# Altium PCB AVR Board 4.0 R1.PcbDoc (part 2 of 2)
Units mil, origin at the board's own origin, x right, y up, seen from the top; angles counter-clockwise.
Board outline 5050 x 3125 mil, 2 copper layers (Top Layer, Bottom Layer); 127 components, 141 nets, 588 pads, 126 vias.
Unrouted connection lines stored in the file: 1.
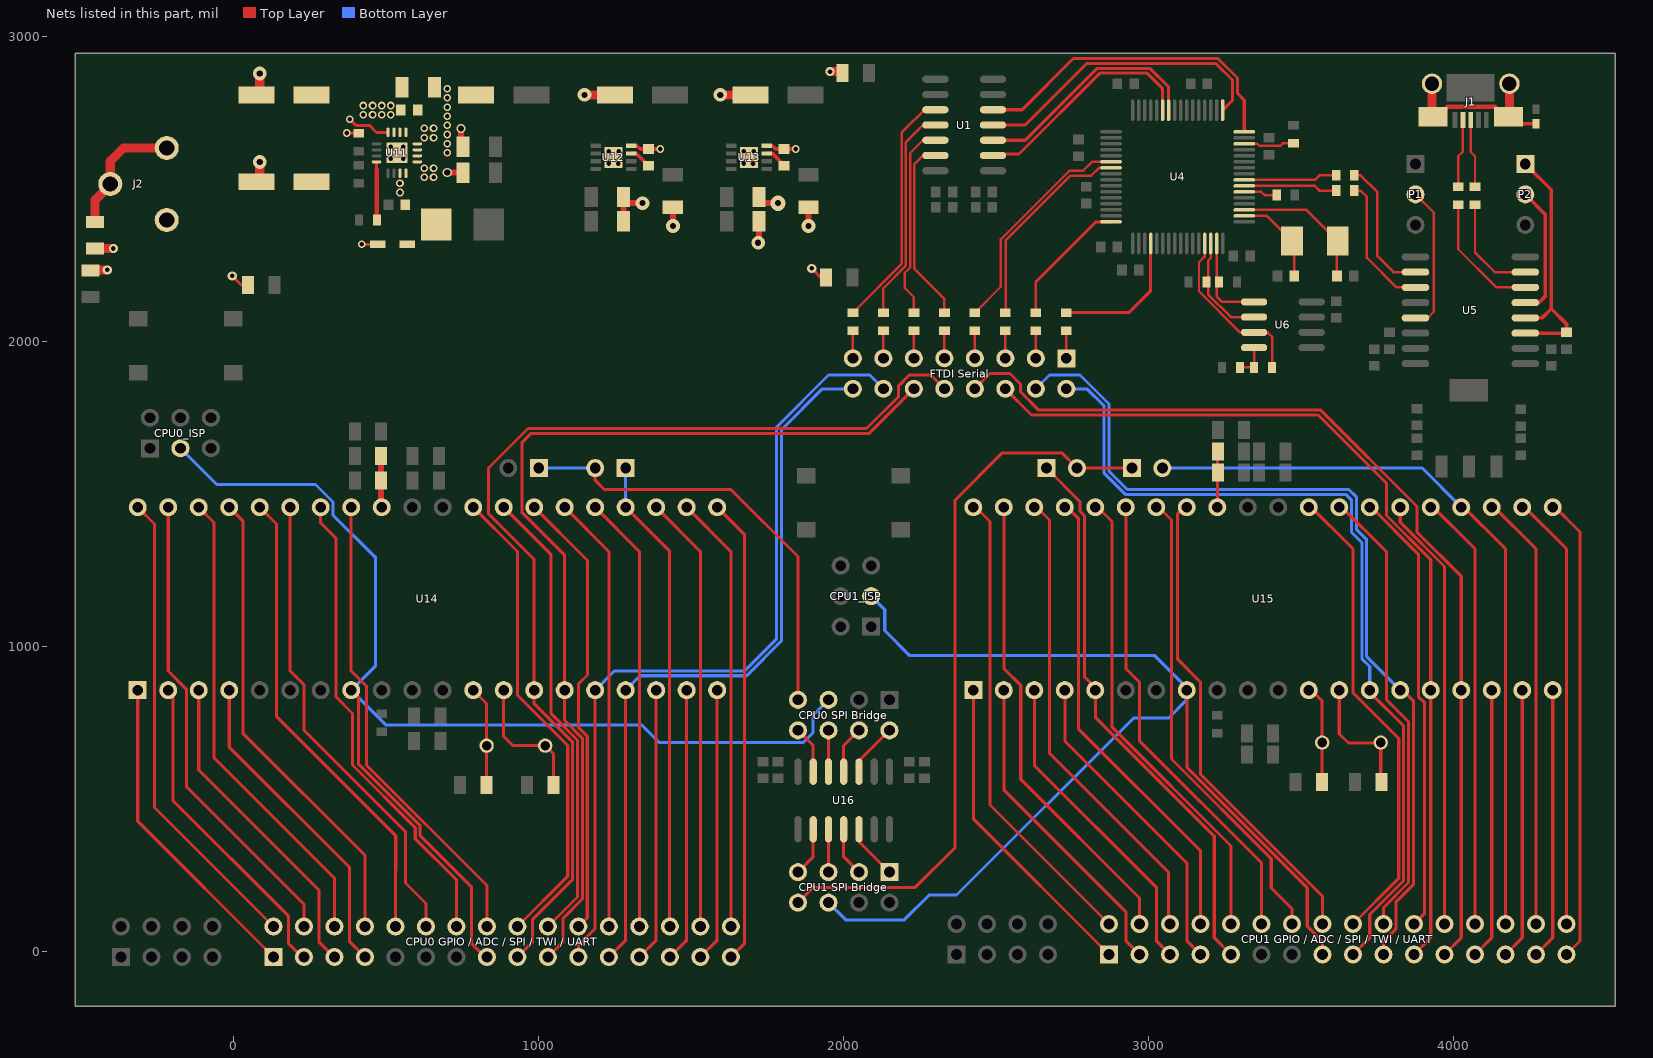
[diagram p2: the nets of this part, all layers, seen from the top]

## Via types
v1: diameter 25, hole 15, Top Layer to Bottom Layer, 82 vias
v2: diameter 30, hole 15, Top Layer to Bottom Layer, 25 vias
v3: diameter 45, hole 20, Top Layer to Bottom Layer, 14 vias
v4: diameter 30, hole 20, Top Layer to Bottom Layer, 4 vias
v5: diameter 50, hole 20, Top Layer to Bottom Layer, 1 vias

## Nets (pads, with @x,y where several pads share a name; then routed paths per layer and width w, separated by ;. In a path a pad name is that pad's centre, name@x,y a point inside that pad or via, vN(x,y) a via of type N, cw(c..) or ccw(c..) an arc to the next point about the centre after c; other vN are vias at no path point) (continued)
NetC24_2: C24.2 P2.1 U5.3 U5.4 | length 841.6
  Top Layer w12: P2.1@4235,2582.5 4320,2497.5 4320,2107.5 ; U5.3@4235.12,2027.5 4367.44,2027.5 C24.2@4370,2030.06 4370,2057.5 4320,2107.5 ; U5.4@4235.12,2077.5 4290,2077.5 4320,2107.5
NetC26_2: C26.2 U4.2 X1.1 | length 308.6
  Top Layer w8: U4.2@3313.5,2412.05 3387.95,2412.05 X1.1@3470,2330 3477.56,2322.44 C26.2@3477.56,2215
NetC27_2: C27.2 U4.3 X1.2 | length 464.1
  Top Layer w8: U4.3@3313.5,2431.73 3517.87,2431.73 X1.2@3619.61,2330 3617.44,2327.83 C27.2@3617.44,2215
NetC48_2: C48.2 U12.3 | length 73.6
  Top Layer w12: U12.3@1303.07,2616.57 1319.65,2616.57 C48.2@1360,2576.22
NetC53_2: C53.2 U13.3 | length 74.9
  Top Layer w12: U13.3@1747.52,2616.57 1766.2,2616.57 1804.45,2578.32 C53.2@1804.45,2576.22
NetC63_2: C63.2 FB7.2 U14.32 | length 169
  Top Layer w20: FB7.2@483.31,1625 C63.2@483.31,1545 483.31,1458.41 U14.32@485,1456.72
NetC65_2: C65.2 FB8.2 U15.32 | length 175.7
  Top Layer w10: U15.32@3225,1465 3225,1638.31 FB8.2@3226.69,1640
NetC66_2: C66.2 U14.12 X2.1 | length 329.3
  Top Layer w10: U14.12@785,856.72 828.94,812.78 X2.1@828.94,675 C66.2@828.94,545.63
NetC67_2: C67.2 U14.13 X2.2 | length 441.5
  Top Layer w10: U14.13@885,856.72 885,705 915,675 X2.2@1021.06,675 1048.31,647.76 C67.2@1048.31,545
NetC68_2: C68.2 U15.12 X3.1 | length 328.5
  Top Layer w10: U15.12@3525,865 3568.94,821.06 X3.1@3568.94,685 3568.94,555.63 C68.2@3568.31,555
NetC69_2: C69.2 U15.13 X3.2 | length 431.1
  Top Layer w10: U15.13@3625,865 3625,713.28 3655,683.28 X3.2@3761.06,683.28 ; X3.2@3761.06,685 X3.2@3761.06,683.28 ; C69.2@3763.31,555 3761.06,557.24 X3.2@3761.06,683.28
"NetCPU0 GPIO / ADC / SPI / TWI / UART_1": "CPU0 GPIO / ADC / SPI / TWI / UART.1" U14.1 | length 1059.3
  Top Layer w10: U14.1@-315,856.72 -315,426.72 130,-18.28
"NetCPU0 GPIO / ADC / SPI / TWI / UART_2": "CPU0 GPIO / ADC / SPI / TWI / UART.2" U14.40 | length 1559.3
  Top Layer w10: U14.40@-315,1456.72 -260,1401.72 -260,471.72 130,81.72
"NetCPU0 GPIO / ADC / SPI / TWI / UART_3": "CPU0 GPIO / ADC / SPI / TWI / UART.3" U14.2 | length 1065.7
  Top Layer w10: U14.2@-215,856.72 -200,841.72 -200,495 180,115 180,25 219.14,-14.14 234.14,-14.14
"NetCPU0 GPIO / ADC / SPI / TWI / UART_4": "CPU0 GPIO / ADC / SPI / TWI / UART.4" U14.39 | length 1559.3
  Top Layer w10: U14.39@-215,1456.72 -215,919.69 -155.53,860.21 -155.53,540.53 230,155 230,81.72
"NetCPU0 GPIO / ADC / SPI / TWI / UART_5": "CPU0 GPIO / ADC / SPI / TWI / UART.5" U14.3 | length 1068.1
  Top Layer w10: U14.3@-115,856.72 -115,595 280,200 280,30 335,-25
"NetCPU0 GPIO / ADC / SPI / TWI / UART_6": "CPU0 GPIO / ADC / SPI / TWI / UART.6" U14.38 | length 1559.3
  Top Layer w10: U14.38@-115,1456.72 -65,1406.72 -65,635 330,240 330,81.72
"NetCPU0 GPIO / ADC / SPI / TWI / UART_7": "CPU0 GPIO / ADC / SPI / TWI / UART.7" U14.4 | length 1059.3
  Top Layer w10: U14.4@-15,856.72 -15,670 380,275 380,31.72 430,-18.28
"NetCPU0 GPIO / ADC / SPI / TWI / UART_8": "CPU0 GPIO / ADC / SPI / TWI / UART.8" U14.37 | length 1566
  Top Layer w10: U14.37@-15,1456.72 29.53,1412.19 29.53,715.47 430,315 430,75
"NetCPU0 GPIO / ADC / SPI / TWI / UART_10": "CPU0 GPIO / ADC / SPI / TWI / UART.10" U14.36 | length 1560.2
  Top Layer w10: U14.36@85,1456.72 140,1401.72 140,846.72 140.47,846.24 140.47,769.78 531,379.25 531,267.86 530,266.86 530,81.72
"NetCPU0 GPIO / ADC / SPI / TWI / UART_12": "CPU0 GPIO / ADC / SPI / TWI / UART.12" U14.35 | length 1559.3
  Top Layer w10: U14.35@185,1456.72 185,919.69 229.53,875.16 229.53,725.98 563,392.51 563,224.37 630,157.37 630,81.72
"NetCPU0 GPIO / ADC / SPI / TWI / UART_14": "CPU0 GPIO / ADC / SPI / TWI / UART.14" U14.34 | length 1559.3
  Top Layer w10: U14.34@285,1456.72 285,1405 335,1355 335,835 389.53,780.47 389.53,611.24 595,405.76 595,370 730,235 730,81.72
"NetCPU0 GPIO / ADC / SPI / TWI / UART_16": "CPU0 GPIO / ADC / SPI / TWI / UART.16" U14.33 | length 1559.3
  Top Layer w10: U14.33@385,1456.72 385,919.69 435,869.69 435,611.02 830,216.02 830,81.72
"NetCPU0 GPIO / ADC / SPI / TWI / UART_17": "CPU0 GPIO / ADC / SPI / TWI / UART.17" "FTDI Serial.10" U14.14 | length 3453.1
  Top Layer w10: 930,-18.28 980,31.72 980,105.25 1111,236.25 1111,686.12 985,812.12 U14.14@985,856.72 985,1285 835,1435 835,1585 965,1715 2075,1715 2180,1820 2180,1855 2215,1890 2285,1890 2330,1845
"NetCPU0 GPIO / ADC / SPI / TWI / UART_18": "CPU0 GPIO / ADC / SPI / TWI / UART.18" U14.29 | length 1571.8
  Top Layer w10: U14.29@785,1456.72 930,1311.72 930,840 1095,675 1095,246.72 930,81.72
"NetCPU0 GPIO / ADC / SPI / TWI / UART_19": "CPU0 GPIO / ADC / SPI / TWI / UART.19" "FTDI Serial.12" U14.15 | length 3174.4
  Top Layer w10: 1030,-18.28 1080,31.72 1080,109.09 1143,172.09 1143,699.37 1085,757.37 U14.15@1085,856.72 1085,1299.4 944.47,1439.93 944.47,1668.47 975,1699 2084,1699 2230,1845
"NetCPU0 GPIO / ADC / SPI / TWI / UART_20": "CPU0 GPIO / ADC / SPI / TWI / UART.20" U14.28 | length 1515.4
  Top Layer w10: U14.28@885,1456.72 1040.47,1301.24 1040.47,779.27 1127,692.75 1127,178.72 1030,81.72
"NetCPU0 GPIO / ADC / SPI / TWI / UART_21": "CPU0 GPIO / ADC / SPI / TWI / UART.21" "FTDI Serial.14" U14.16 | length 2696.5
  Top Layer w10: 1130,-18.28 1130,20 1185,75 U14.16@1185,856.72
  Bottom Layer w10: U14.16@1185,856.72 1248.28,920 1675,920 1780,1025 1780,1720 1950,1890 2085,1890 2130,1845
"NetCPU0 GPIO / ADC / SPI / TWI / UART_22": "CPU0 GPIO / ADC / SPI / TWI / UART.22" U14.27 | length 1483.9
  Top Layer w10: U14.27@985,1456.72 1160,1281.72 1160,906.72 1130,876.72 1130,735 1159,706 1159,110.72 1130,81.72
"NetCPU0 GPIO / ADC / SPI / TWI / UART_23": "CPU0 GPIO / ADC / SPI / TWI / UART.23" "FTDI Serial.16" U14.17 | length 2457.9
  Top Layer w10: 1230,-18.28 1285,36.72 U14.17@1285,856.72
  Bottom Layer w10: U14.17@1285,856.72 1332.28,904 1681.63,904 1796,1018.37 1796,1711 1930,1845 2030,1845
"NetCPU0 GPIO / ADC / SPI / TWI / UART_24": "CPU0 GPIO / ADC / SPI / TWI / UART.24" U14.26 | length 1435.1
  Top Layer w10: U14.26@1085,1456.72 1230,1311.72 1230,81.72
"NetCPU0 GPIO / ADC / SPI / TWI / UART_25": "CPU0 GPIO / ADC / SPI / TWI / UART.25" U14.18 | length 897.8
  Top Layer w10: 1330,-18.28 1385,36.72 U14.18@1385,856.72
"NetCPU0 GPIO / ADC / SPI / TWI / UART_26": "CPU0 GPIO / ADC / SPI / TWI / UART.26" U14.25 | length 1435.1
  Top Layer w10: U14.25@1185,1456.72 1330,1311.72 1330,81.72
"NetCPU0 GPIO / ADC / SPI / TWI / UART_27": "CPU0 GPIO / ADC / SPI / TWI / UART.27" U14.19 | length 897.8
  Top Layer w10: 1430,-18.28 1485,36.72 U14.19@1485,856.72
"NetCPU0 GPIO / ADC / SPI / TWI / UART_29": "CPU0 GPIO / ADC / SPI / TWI / UART.29" U14.20 | length 897.8
  Top Layer w10: 1530,-18.28 1585,36.72 U14.20@1585,856.72
"NetCPU0 GPIO / ADC / SPI / TWI / UART_30": "CPU0 GPIO / ADC / SPI / TWI / UART.30" U14.23 | length 1435.1
  Top Layer w10: U14.23@1385,1456.72 1530,1311.72 1530,81.72
"NetCPU0 GPIO / ADC / SPI / TWI / UART_31": "CPU0 GPIO / ADC / SPI / TWI / UART.31" U14.21 | length 1530.9
  Top Layer w10: U14.21@1585,1456.72 1675,1366.72 1675,26.72 1630,-18.28
"NetCPU0 GPIO / ADC / SPI / TWI / UART_32": "CPU0 GPIO / ADC / SPI / TWI / UART.32" U14.22 | length 1435.1
  Top Layer w10: U14.22@1485,1456.72 1630,1311.72 1630,81.72
"NetCPU0 SPI Bridge Select_2": "CPU0 SPI Bridge.2" U16.10 | length 141.4
  Top Layer w10: U16.10@2050,625 2150,725
"NetCPU0 SPI Bridge Select_4": "CPU0 SPI Bridge.4" U16.11 | length 156.2
  Top Layer w10: U16.11@2000,589.49 2000,675 2050,725
"NetCPU0 SPI Bridge Select_6": "CPU0 SPI Bridge.6" U16.12 | length 135.5
  Top Layer w10: U16.12@1950,589.49 1950,725
"NetCPU0 SPI Bridge Select_8": "CPU0 SPI Bridge.8" U16.13 | length 156.2
  Top Layer w10: 1850,725 1900,675 U16.13@1900,589.49
NetCPU0-Master_1: "CPU0 GPIO / ADC / SPI / TWI / UART.28" CPU0-Master.1 U14.24 | length 1564.5
  Top Layer w10: U14.24@1285,1456.72 1428.03,1313.69 1428.03,81.72 1430,81.72
  Bottom Layer w10: U14.24@1285,1456.72 CPU0-Master.1@1285,1585
NetCPU0-Master_2: "CPU0 SPI Bridge.7" CPU0-Master.2 CPU0-Slave.1 | length 1463.6
  Top Layer w10: CPU0-Master.2@1185,1585 1185,1545 1215,1515 1630,1515 1850,1295 1850,825
  Bottom Layer w10: CPU0-Slave.1@1000,1585 CPU0-Master.2@1185,1585
"NetCPU1 GPIO / ADC / SPI / TWI / UART_1": "CPU1 GPIO / ADC / SPI / TWI / UART.1" U15.1 | length 1059.3
  Top Layer w10: U15.1@2425,865 2425,435 2870,-10
"NetCPU1 GPIO / ADC / SPI / TWI / UART_2": "CPU1 GPIO / ADC / SPI / TWI / UART.2" U15.40 | length 1559.3
  Top Layer w10: U15.40@2425,1465 2480,1410 2480,480 2870,90
"NetCPU1 GPIO / ADC / SPI / TWI / UART_3": "CPU1 GPIO / ADC / SPI / TWI / UART.3" U15.2 | length 1059.3
  Top Layer w10: U15.2@2525,865 2525,530 2925,130 2925,35 2970,-10
"NetCPU1 GPIO / ADC / SPI / TWI / UART_4": "CPU1 GPIO / ADC / SPI / TWI / UART.4" U15.39 | length 1559.3
  Top Layer w10: U15.39@2525,1465 2525,927.97 2580.47,872.5 2580.47,564.53 2970,175 2970,90
"NetCPU1 GPIO / ADC / SPI / TWI / UART_5": "CPU1 GPIO / ADC / SPI / TWI / UART.5" U15.3 | length 1059.3
  Top Layer w10: U15.3@2625,865 2625,610 3025,210 3025,35 3070,-10
"NetCPU1 GPIO / ADC / SPI / TWI / UART_6": "CPU1 GPIO / ADC / SPI / TWI / UART.6" U15.38 | length 1559.3
  Top Layer w10: U15.38@2625,1465 2675,1415 2675,650 3065,260 3065,95 3070,90
"NetCPU1 GPIO / ADC / SPI / TWI / UART_7": "CPU1 GPIO / ADC / SPI / TWI / UART.7" U15.4 | length 1059.3
  Top Layer w10: U15.4@2725,865 2725,690 3125,290 3125,35 3170,-10
"NetCPU1 GPIO / ADC / SPI / TWI / UART_8": "CPU1 GPIO / ADC / SPI / TWI / UART.8" U15.37 | length 1559.3
  Top Layer w10: U15.37@2725,1465 2769.53,1420.47 2769.53,730.47 3170,330 3170,90
"NetCPU1 GPIO / ADC / SPI / TWI / UART_10": "CPU1 GPIO / ADC / SPI / TWI / UART.10" U15.36 | length 1559.3
  Top Layer w10: U15.36@2825,1465 2880,1410 2880,855 2880.47,854.53 2880.47,735.04 3270,345.51 3270,90
"NetCPU1 GPIO / ADC / SPI / TWI / UART_12": "CPU1 GPIO / ADC / SPI / TWI / UART.12" U15.35 | length 1559.3
  Top Layer w10: U15.35@2925,1465 2925,927.97 2969.53,883.44 2969.53,691.24 3370,290.76 3370,90
"NetCPU1 GPIO / ADC / SPI / TWI / UART_14": "CPU1 GPIO / ADC / SPI / TWI / UART.14" U15.34 | length 1559.3
  Top Layer w10: U15.34@3025,1465 3075,1415 3075,631.02 3402,304.02 3402,208 3470,140 3470,90
"NetCPU1 GPIO / ADC / SPI / TWI / UART_16": "CPU1 GPIO / ADC / SPI / TWI / UART.16" U15.33 | length 1584.2
  Top Layer w10: U15.33@3125,1465 3095,1435 3095,957.97 3169.53,883.44 3169.53,581.75 3570,181.27 3570,90
"NetCPU1 GPIO / ADC / SPI / TWI / UART_17": "CPU1 GPIO / ADC / SPI / TWI / UART.17" "FTDI Serial.2" U15.14 | length 2853.4
  Top Layer w10: 3670,-10 3725,45 3725,121.37 3836,232.37 3836,739 3725,850 U15.14@3725,856.72 U15.14@3725,865
  Bottom Layer w10: 2730,1845 2797.37,1845 2854,1788.37 2854,1568.37 2923.37,1499 3646,1499 3665.53,1479.47 3665.53,1439.93 3665,1439.4 3665,1375 3699,1341 3699,960.09 3725,934.09 U15.14@3725,856.72
"NetCPU1 GPIO / ADC / SPI / TWI / UART_18": "CPU1 GPIO / ADC / SPI / TWI / UART.18" U15.29 | length 1559.3
  Top Layer w10: U15.29@3525,1465 3670,1320 3670,848.28 3820,698.28 3820,240 3670,90
"NetCPU1 GPIO / ADC / SPI / TWI / UART_19": "CPU1 GPIO / ADC / SPI / TWI / UART.19" "FTDI Serial.4" U15.15 | length 2990.5
  Top Layer w10: 3770,-10 3770,32.69 3810.53,73.21 3810.53,161.65 3868,219.12 3868,822 U15.15@3825,865
  Bottom Layer w10: 2630,1845 2675,1890 2775,1890 2870,1795 2870,1575 2930,1515 3655.94,1515 3681.88,1489.06 3681.88,1383.12 3715,1350 3715,966.72 U15.15@3825,856.72
"NetCPU1 GPIO / ADC / SPI / TWI / UART_20": "CPU1 GPIO / ADC / SPI / TWI / UART.20" U15.28 | length 1503
  Top Layer w10: U15.28@3625,1465 3780.47,1309.53 3780.47,824.53 3852,753 3852,225.75 3770,143.75 3770,90
"NetCPU1 GPIO / ADC / SPI / TWI / UART_21": "CPU1 GPIO / ADC / SPI / TWI / UART.21" "FTDI Serial.6" U15.16 | length 3006.2
  Top Layer w10: 2530,1845 2616,1759 3556,1759 3780,1535 3780,1429.75 3925,1284.75 U15.16@3925,856.72 3925,45 3870,-10
"NetCPU1 GPIO / ADC / SPI / TWI / UART_22": "CPU1 GPIO / ADC / SPI / TWI / UART.22" U15.27 | length 1464.1
  Top Layer w10: U15.27@3725,1465 3725,1462.12 3884.47,1302.65 3884.47,835.53 3905,815 3905,125 3870,90
"NetCPU1 GPIO / ADC / SPI / TWI / UART_23": "CPU1 GPIO / ADC / SPI / TWI / UART.23" "FTDI Serial.8" U15.17 | length 3217.8
  Top Layer w10: 2430,1845 2480,1895 2545,1895 2580,1860 2580,1835 2640,1775 3564.03,1775 3880,1459.03 3880,1375 4025,1230 U15.17@4025,856.72 4025,45 3970,-10
"NetCPU1 GPIO / ADC / SPI / TWI / UART_24": "CPU1 GPIO / ADC / SPI / TWI / UART.24" U15.26 | length 1435.1
  Top Layer w10: U15.26@3825,1465 3825,1407.37 3970,1262.37 3970,90
"NetCPU1 GPIO / ADC / SPI / TWI / UART_25": "CPU1 GPIO / ADC / SPI / TWI / UART.25" U15.18 | length 897.8
  Top Layer w10: 4070,-10 4125,45 U15.18@4125,865
"NetCPU1 GPIO / ADC / SPI / TWI / UART_26": "CPU1 GPIO / ADC / SPI / TWI / UART.26" U15.25 | length 1435.1
  Top Layer w10: U15.25@3925,1465 4070,1320 4070,90
"NetCPU1 GPIO / ADC / SPI / TWI / UART_27": "CPU1 GPIO / ADC / SPI / TWI / UART.27" U15.19 | length 897.8
  Top Layer w10: 4170,-10 4225,45 U15.19@4225,865
"NetCPU1 GPIO / ADC / SPI / TWI / UART_29": "CPU1 GPIO / ADC / SPI / TWI / UART.29" U15.20 | length 897.8
  Top Layer w10: 4270,-10 4325,45 U15.20@4325,865
"NetCPU1 GPIO / ADC / SPI / TWI / UART_30": "CPU1 GPIO / ADC / SPI / TWI / UART.30" U15.23 | length 1435.1
  Top Layer w10: U15.23@4125,1465 4270,1320 4270,90
"NetCPU1 GPIO / ADC / SPI / TWI / UART_31": "CPU1 GPIO / ADC / SPI / TWI / UART.31" U15.21 | length 1530.5
  Top Layer w10: U15.21@4325,1465 4414.53,1375.47 4414.53,34.53 4370,-10
"NetCPU1 GPIO / ADC / SPI / TWI / UART_32": "CPU1 GPIO / ADC / SPI / TWI / UART.32" U15.22 | length 1435.1
  Top Layer w10: U15.22@4225,1465 4370,1320 4370,90
"NetCPU1 SPI Bridge Select_1": "CPU1 SPI Bridge.1" U16.5 | length 141.4
  Top Layer w10: U16.5@2050,360 2150,260
"NetCPU1 SPI Bridge Select_3": "CPU1 SPI Bridge.3" U16.4 | length 161.2
  Top Layer w10: U16.4@2000,400.51 2000,310 2050,260
"NetCPU1 SPI Bridge Select_5": "CPU1 SPI Bridge.5" U16.3 | length 140.5
  Top Layer w10: 1950,260 U16.3@1950,400.51
"NetCPU1 SPI Bridge Select_7": "CPU1 SPI Bridge.7" U16.2 | length 161.2
  Top Layer w10: 1850,260 1900,310 U16.2@1900,400.51
NetCPU1-Master_1: "CPU1 SPI Bridge.8" CPU1-Master.1 CPU1-Slave.2 | length 2394.5
  Top Layer w10: 1850,160 1900,210 2235,210 2365,340 2365,1480 2520,1635 2715,1635 CPU1-Slave.2@2765,1585 CPU1-Master.1@2945,1585
NetCPU1-Master_2: "CPU1 GPIO / ADC / SPI / TWI / UART.28" CPU1-Master.2 U15.24 | length 2468.2
  Top Layer w10: U15.24@4025,1465 4170,1320 4170,90
  Bottom Layer w10: CPU1-Master.2@3045,1585 3896.72,1585 U15.24@4025,1456.72
NetCPU1-Slave_1: "CPU1 GPIO / ADC / SPI / TWI / UART.9" CPU1-Slave.1 U15.5 | length 1845.6
  Top Layer w10: CPU1-Slave.1@2665,1585 2775,1475 2775,1443.28 2789.53,1428.76 2789.53,900.47 2825,865 2825,767.88 3215,377.88 3215,45 3270,-10
NetFB1_1: FB1.1 J1.6 J1.7 J1.8 J1.9 | length 566.1
  Top Layer w12: J1.9@4193.75,2723.61 4184.02,2713.88 FB1.1@4270,2713.88
  Top Layer w15: J1.6@3931.97,2721.97 3980,2770 4135,2770 J1.9@4180,2725
  Top Layer w30: J1.6@3929.02,2737.36 J1.7@3929.02,2818.13 ; J1.8@4182.95,2818.13 4182.95,2734.41 J1.9@4193.75,2723.61
NetFB2_2: FB2.2 J2.2 J2.3 | length 423
  Top Layer w30: FB2.2@-455,2392.09 -455,2463.78 -405.04,2513.74 J2.3@-405.04,2516.89 -405.04,2591.18 -361.22,2635 J2.2@-220,2635
"NetFTDI Serial_1": "FTDI Serial.1" R4.2 | length 90.5
  Top Layer w8: 2730,1945 R4.2@2730,2035.47
"NetFTDI Serial_3": "FTDI Serial.3" R3.2 | length 90.5
  Top Layer w8: 2630,1945 R3.2@2630,2035.47
"NetFTDI Serial_5": "FTDI Serial.5" R2.2 | length 90.5
  Top Layer w8: 2530,1945 R2.2@2530,2035.47
"NetFTDI Serial_7": "FTDI Serial.7" R1.2 | length 90.5
  Top Layer w8: 2430,1945 R1.2@2430,2035.47
"NetFTDI Serial_9": "FTDI Serial.9" R7.2 | length 90.5
  Top Layer w8: 2330,1945 R7.2@2330,2035.47
"NetFTDI Serial_11": "FTDI Serial.11" R8.2 | length 90.5
  Top Layer w8: 2230,1945 R8.2@2230,2035.47
"NetFTDI Serial_13": "FTDI Serial.13" R6.2 | length 90.5
  Top Layer w8: 2130,1945 R6.2@2130,2035.47
"NetFTDI Serial_15": "FTDI Serial.15" R5.2 | length 90.5
  Top Layer w8: 2030,1945 R5.2@2030,2035.47
NetJ1_2: J1.2 R18.1 | length 198.4
  Top Layer w8: R18.1@4015,2507.03 4015,2607.5 4030.39,2622.89 4030.39,2699.04
NetJ1_3: J1.3 R17.1 | length 197.8
  Top Layer w8: 4055.98,2699.04 4055.98,2621.52 4070,2607.5 R17.1@4070,2507.03
NetP1_2: P1.2 U5.13 | length 478.3
  Top Layer w8: U5.13@3874.88,2077.5 3915,2077.5 3935,2097.5 3935,2422.5 P1.2@3875,2482.5
NetP2_2: P2.2 U5.5 | length 435.1
  Top Layer w12: P2.2@4235,2482.5 4300,2417.5 4300,2147.5 4280,2127.5 U5.5@4235.12,2127.5
NetR1_1: R1.1 U4.38 | length 742.5
  Top Layer w8: R1.1@2430,2094.53 2515,2179.53 2515,2335 2740,2560 2785,2560 2814.21,2589.21 U4.38@2876.5,2589.21
NetR2_1: R2.1 U4.39 | length 681.3
  Top Layer w8: R2.1@2531,2095.53 2531,2331.2 2743.8,2544 2811.63,2544 2837.15,2569.53 U4.39@2876.5,2569.53
  Top Layer w10: R2.1@2530,2094.53 R2.1@2531,2095.53
NetR3_1: R3.1 U4.48 | length 428.7
  Top Layer w8: R3.1@2630,2094.53 2630,2195
  Top Layer w10: 2630,2195 2827.36,2392.36 U4.48@2876.5,2392.36
NetR4_1: R4.1 U4.52 | length 461.3
  Top Layer w10: R4.1@2730,2094.53 2934.53,2094.53 3006.42,2166.42 U4.52@3006.42,2321.5
NetR5_1: R5.1 U1.10 | length 791.4
  Top Layer w8: R5.1@2030,2094.53 2190,2254.53 2190,2685 2271.09,2766.09 U1.10@2291.09,2766.09
NetR6_1: R6.1 U1.11 | length 709.8
  Top Layer w8: R6.1@2130,2094.53 2130,2174.73 2204,2248.73 2204,2654 2260,2710 U1.11@2300.51,2710
NetR7_1: R7.1 U1.13 | length 608.2
  Top Layer w8: U1.13@2300.51,2610 2260,2610 2232,2582 2232,2238 2330,2140 R7.1@2330,2094.53
NetR8_1: R8.1 U1.12 | length 643.3
  Top Layer w8: R8.1@2230,2094.53 2230,2145 2200,2175 2200,2224.93 2218,2242.93 2218,2618 2260,2660 U1.12@2300.51,2660
NetR9_1: R9.1 U5.11 | length 449
  Top Layer w8: R9.1@3674.53,2495 3695,2495 3715,2475 3715,2275 3812.5,2177.5 U5.11@3874.88,2177.5
NetR9_2: R9.2 U4.7 | length 307.9
  Top Layer w8: U4.7@3313.5,2510.47 3544.53,2510.47 3560,2495 R9.2@3615,2495
NetR10_1: R10.1 U5.10 | length 454.9
  Top Layer w8: R10.1@3674.53,2545 3695,2545 3750,2490 3750,2280 3802.5,2227.5 U5.10@3874.88,2227.5
NetR10_2: R10.2 U4.8 | length 307.6
  Top Layer w8: U4.8@3313.5,2530.16 3545.16,2530.16 3560,2545 R10.2@3615,2545
NetR11_1: R11.1 U4.14 | length 167.8
  Top Layer w8: U4.14@3313.5,2648.27 3356.73,2648.27 3363.19,2641.81 3431.81,2641.81 3440.47,2650.47 R11.1@3475,2650.47
NetR12_1: R12.1 U4.6 | length 111.4
  Top Layer w8: U4.6@3313.5,2490.79 3369.21,2490.79 3380,2480 R12.1@3420.47,2480
NetR13_1: R13.1 U4.63 U6.1 | length 304.1
  Top Layer w8: U4.63@3222.95,2321.5 3222.95,2147.05 3240,2130 U6.1@3345.51,2130
NetR14_1: R14.1 U4.62 U6.2 | length 351.6
  Top Layer w8: U4.62@3203.27,2321.5 3203.27,2273.27 3195,2265 3195,2154.8 3269.8,2080 U6.2@3345.51,2080
NetR15_1: R15.1 R16.1 U6.4 | length 110.9
  Top Layer w8: R15.1@3299.53,1915 R16.1@3345.47,1915 ; R16.1@3345.47,1915 U6.4@3345.51,1980
NetR16_2: R16.2 U4.61 U6.3 | length 566.1
  Top Layer w8: U4.61@3183.58,2321.5 3183.58,2278.58 3165,2260 3165,2165 3300,2030 U6.3@3345.51,2030 3390,2030 3404.53,2015.47 R16.2@3404.53,1915
NetR17_2: R17.2 U5.7 | length 347.5
  Top Layer w8: R17.2@4070,2447.97 4070,2292.5 4135,2227.5 U5.7@4235.12,2227.5
NetR18_2: R18.2 U5.6 | length 417.4
  Top Layer w8: R18.2@4015,2447.97 4015,2302.5 4140,2177.5 U5.6@4235.12,2177.5
NetU1_2: U1.2 U4.27 | length 767.3
  Top Layer w10: U1.2@2480,2615 2575,2615 2840,2880 2995,2880 3045.79,2829.21 U4.27@3045.79,2758.5
NetU1_3: U1.3 U4.26 | length 775.2
  Top Layer w10: U1.3@2489.49,2660 2595,2660 2831,2896 3004,2896 3065.47,2834.53 U4.26@3065.47,2758.5
NetU1_4: U1.4 U4.17 | length 1004.1
  Top Layer w10: U1.4@2489.49,2710 2595,2710 2797,2912 3220.37,2912 3275,2857.37 3275,2790.87 U4.17@3242.64,2758.5
NetU1_5: U1.5 U4.16 | length 1083.3
  Top Layer w10: U1.5@2489.49,2760 2585,2760 2753,2928 3227,2928 3291,2864 3291,2814 3313.5,2791.5 U4.16@3313.5,2687.64
PG: R34.2 U11.8 | length 194
  Top Layer w10: 468.07,2563.78 U11.8@468.07,2589.25
  Top Layer w15: R34.2@468.07,2395.24 468.07,2563.78
PGND: C37.1 C38.2 C39.2 C40.1 C41.1 C42.2 C43.2 C44.2 C45.1 C46.2 C47.2 C48.1 C49.2 C50.1 C51.2 C52.2 C53.1 D1.1 FB2.1 FB3.2 FB4.2 FB5.2 FB6.2 R35.1 U11.4 U11.14 U11.15 U11.17 U12.4 U12.9 U13.4 U13.9 | length 1558.4
  Top Layer w10: v2(-5,2215) 25,2185 FB4.2@46.69,2185 ; v1(370,2683.78) R35.1@409.53,2683.78 ; v1(380,2728.78) 400,2708.78 445,2708.78 468.07,2685.71 U11.4@505.47,2685.71 ; v1(420,2318.78) D1.1@471.77,2318.78 ; v2(1895,2240) 1925,2210 FB3.2@1941.69,2210
  Top Layer w12: C43.2@74.45,2523.78 C43.2@85,2534.33 ; U12.4@1303.07,2642.17 1321.61,2642.17 1332.44,2631.34 C48.1@1360,2631.34 v1(1398.66,2631.34) ; U13.4@1747.52,2642.17 1766.06,2642.17 1776.89,2631.34 C53.1@1804.45,2631.34 v1(1843.11,2631.34)
  Top Layer w20: v4(700,2553.78) C38.2@746.85,2553.78 ; C37.1@745,2640.63 v4(745,2698.78) ; C44.2@1278.15,2393.78 C45.1@1278.15,2473.78 1298.15,2453.78 v3(1340,2453.78) ; v3(1440,2378.78) C46.2@1440,2440.63 ; v3(1719.45,2323.78) 1722.6,2326.93 C49.2@1722.6,2393.78 ; C50.1@1722.6,2473.78 1742.6,2453.78 v5(1784.45,2453.78) ; v3(1884.45,2378.78) C51.2@1884.45,2440.63
  Top Layer w30: FB5.2@-471.69,2235 v2(-415,2235) ; FB2.1@-455,2305.47 v2@-395.47,2305.47 ; C43.2@85,2534.33 v3(85,2588.78) ; C42.2@85,2819.33 v3(85,2878.78) ; v3(1150,2808.78) C47.2@1249.45,2808.78 ; v3(1595,2808.78) C52.2@1693.9,2808.78 ; v2(1955,2885) FB6.2@1991.69,2885
  other v1: 1260,2582.78 1702.45,2582.78 1230,2583.78 1672.45,2583.78 515,2598.78 555,2598.78 700,2618.78 1230,2623.78 1262,2623.78 1672.45,2623.78 1704.45,2623.78 515,2638.78 555,2638.78 700,2648.78 700,2678.78 700,2708.78 700,2738.78 700,2768.78 700,2798.78 700,2828.78
  other v2: -395,2305
SCK_0: "CPU0 GPIO / ADC / SPI / TWI / UART.15" "CPU0 SPI Bridge.5" CPU0_ISP.3 U14.8 | length 4075.5
  Top Layer w10: U14.8@385,856.72 409.53,832.19 409.53,613.86 611,412.39 611,379 780,210 780,25 830,-25
  Bottom Layer w10: CPU0_ISP.3@-175,1650 -56,1531 268.03,1531 325.53,1473.5 325.53,1430.53 465,1291.06 465,936.72 U14.8@385,856.72 499.72,742 1338.25,742 1395.78,684.47 1866.79,684.47 1900,717.69 1900,775 1950,825
SCK_1: "CPU1 GPIO / ADC / SPI / TWI / UART.15" "CPU1 SPI Bridge.6" CPU1_ISP.3 U15.8 | length 3795.9
  Top Layer w10: U15.8@3125,865 3125,603.65 3520,208.65 3520,82.69 3570,32.69 3570,-10
  Bottom Layer w10: 1950,160 2006.53,103.47 2198.47,103.47 2280,185 2370,185 2950,765 3065,765 3125,825 3125,865 3020,970 2216.72,970 2134.53,1052.19 2134.53,1120.47 CPU1_ISP.3@2090,1165
SW: C36.1 D1.2 L1.1 U11.1 U11.12 U11.13 U11.16
  other v1: 625,2538.78 655,2538.78 625,2568.78 655,2568.78 625,2668.78 655,2668.78 625,2698.78 655,2698.78
VIN: C40.2 C41.2 C42.1 C43.1 J2.1 U11.2 U11.3 U11.11
  other v1: 545,2488.78 544.84,2518.78 425,2743.78 455,2743.78 485,2743.78 515,2743.78 425,2773.78 455,2773.78 485,2773.78 515,2773.78
pads on no net: J1.4 J1.GND U1.6 U1.9 U4.4 U4.9 U4.18 U4.19 U4.21 U4.22 U4.23 U4.24 U4.28 U4.29 U4.30 U4.32 U4.33 U4.34 U4.36 U4.40 U4.41 U4.43 U4.44 U4.45 U4.46 U4.53 U4.54 U4.55 U4.57 U4.58 U4.59 U4.60 U11.6 U11.7 U11.9 U12.2 U12.6 U12.7 U13.2 U13.6 U13.7 U16.6 U16.9

## Polygon pours and split planes (outlines as drawn)
GND on Top Layer "Mechanical 15-No Net" (solid, remove dead copper, pour order 33): 4535,1760 4475,1760 3560,1760 3220,1760 2125,1760 2075,1710 2055,1710 685,1710 685,2170 2070,2170 2070,2460 2070,2950 2075,2945 4535,2945
GND on Top Layer "Mechanical 15-No Net" (solid, remove dead copper, pour order 31): 1740,-180 1740,625 2262.56,625 2265,622.56 2265,965 1765,965 1765,1690 2085,1690 2135,1740 4535,1740 4535,-180
GND on Top Layer "Mechanical 15-No Net" (solid, remove dead copper, pour order 4): -520,2170 -520,2035 -520,-180 -370,-180 1725,-180 1725,-30 1725,645 1805,645 2240,645 2240,945 1730,945 1730,2170
VIN on Top Layer "Mechanical 15-No Net" (solid, remove dead copper, pour order 19): 555,2573.78 535,2573.78 535,2538.78 525,2538.78 525,2473.78 565,2473.78 565,2538.78 555,2538.78
SW on Top Layer "Mechanical 15-No Net" (solid, pour order 21): 560,2718.78 560,2653.78 575,2653.78 575,2643.78 675,2643.78 675,2718.78
SW on Top Layer "Mechanical 15-No Net" (solid, pour order 20): 560,2593.78 620,2593.78 620,2583.78 675,2583.78 675,2438.78 705,2438.78 705,2328.78 600,2328.78 600,2303.78 540,2303.78 540,2333.78 550,2333.78 550,2468.78 570,2468.78 570,2528.78 560,2528.78
3.3VCC on Top Layer "Mechanical 15-No Net" (solid, remove dead copper, pour order 25): 1279.58,2578.76 1279.58,2523.76 1426.58,2523.76 1426.58,2568.76 1399.58,2568.76 1384.58,2553.76 1330.58,2553.76 1328.58,2555.76 1328.58,2578.76
PGND on Top Layer "Mechanical 15-No Net" (solid, remove dead copper, pour order 22): 575,2633.78 575,2603.78 715,2603.78 715,2773.78 865,2773.78 865,2843.78 715,2843.78 715,2878.78 620,2878.78 620,2788.78 585,2788.78 585,2723.78 680,2723.78 680,2633.78
3.3VCC_3 on Top Layer "Mechanical 15-No Net" (solid, remove dead copper, pour order 24): 1724.03,2578.76 1724.03,2523.76 1871.03,2523.76 1871.03,2568.76 1844.03,2568.76 1829.03,2553.76 1775.03,2553.76 1773.03,2555.76 1773.03,2578.76
VIN on Top Layer "Mechanical 15-No Net" (solid, pour order 18): 550,2663.78 520,2663.78 520,2723.78 400,2723.78 400,2748.78 315,2748.78 320,2318.78 -350,2318.78 -350,2443.78 195,2443.78 195,2873.78 575,2873.78 575,2788.78 565,2788.78 565,2723.78 550,2723.78
5VCC on Top Layer "Mechanical 15-No Net" (solid, pour order 23): 890,2688.78 985,2688.78 985,2268.78 1650,2268.78 1650,2573.78 1610,2573.78 1610,2628.78 1655,2628.78 1655,2643.78 1660,2643.78 1660,2673.78 1655,2678.78 1575,2678.78 1575,2343.78 1210,2343.78 1210,2573.78 1160,2573.78 1160,2628.78 1210,2628.78 1210,2643.78 1215,2643.78 1215,2673.78 1210,2678.78 1040,2678.78 1040,2848.78 900,2848.78 900,2768.78 820,2768.78 820,2503.78 815,2498.78 770,2498.78 770,2268.78 890,2268.78
VIN on Bottom Layer "Mechanical 15-No Net" (solid, pour order 16): 533.21,2788.78 533.21,2728.78 485,2728.78 485,2538.78 560,2538.78 560,2473.78 410,2473.78 410,2788.78
SW on Bottom Layer "Mechanical 15-No Net" (solid, pour order 17): 595,2518.78 595,2718.78 675,2718.78 675,2518.78
PGND on Bottom Layer "Mechanical 15-No Net" (solid, remove dead copper, pour order 27): 1985,2945 1985,2890 1985,2250 1925,2190 1905,2190 -520,2190 -520,2230 -520,2945
IGND on Bottom Layer "Mechanical 15-No Net" (solid, remove dead copper, pour order 15): 3790,2945 3790,2647.5 4045,2647.5 4060,2635 4060,1905 4530,1905 4530,2945
GND on Bottom Layer "Mechanical 15-No Net" (solid, remove dead copper, pour order 26): -520,2170 1955,2170 2005,2220 2005,2945 3790,2945 3790,2647.5 4045,2647.5 4055,2637.5 4055,1905 4530,1905 4530,-180 -520,-180
GND on Mechanical 15 "Mechanical 15-No Net" (solid, remove dead copper, pour order 38): -520,2170 45,2170 1955,2170 2005,2220 2005,2945 3790,2945 3790,2647.5 4045,2647.5 4055,2637.5 4055,1510 4530,1510 4530,-180 4475,-180 -520,-180

## Silkscreen, mask and mechanical layers (free items; w line width, h text height)
Top Overlay:
  text "12V Input" at -485,2925 h100 r270
  text "FTDI Serial" at 3325,2840 h100
  text "5V 3A" at 185,2225 h100
  text "3.3V 1A" at 1170,2225 h100
  text "3.3V 1A" at 1555,2225 h100
  text "USB 2.0 Fullspeed" at 4470,2175 h100 r90
  text "Research And Development" at 685,2110 h100
  text "C0TX1" at 1530,1995 h75 r270
  text "C0RX1" at 1585,1995 h75 r270
  text "C0TX0" at 1640,1995 h75 r270
  text "C0RX0" at 1695,1995 h75 r270
  text "C1TX1" at 1750,1995 h75 r270
  text "C1RX1" at 1810,1995 h75 r270
  text "C1TX0" at 1865,1995 h75 r270
  text "C1RX0" at 1920,1995 h75 r270
  text "MODULE 1.0" at 705,1990 h150
  text "Designed By" at 685,1915 h75
  text "Adam Vadala-Roth" at 685,1860 h75
  text "www.ZPress3D.com" at 685,1805 h75
  text "Z" at 245,1775 h100
  text "CPU 1" at 2340,705 h150
  text "CPU 0" at -390,695 h150
  text "3.3v / 3.3v" at 2385,170 h75 r90
  text "GND / GND" at 2485,170 h75 r90
  text "5.0v / 5.0v" at 2585,170 h75 r90
  text "GND / GND" at 2685,170 h75 r90
  text "PB0 / PA0" at 2885,170 h75 r90
  text "PB1 / PA1" at 2985,170 h75 r90
  text "PB2 / PA2" at 3085,170 h75 r90
  text "PB3 / PA3" at 3185,170 h75 r90
  text "PB4 / PA4" at 3285,170 h75 r90
  text "PB5 / PA5" at 3385,170 h75 r90
  text "PB6 / PA6" at 3485,170 h75 r90
  text "PB7 / PA7" at 3585,170 h75 r90
  text "PD0 / PC0" at 3690,170 h75 r90
  text "PD1 / PC1" at 3790,170 h75 r90
  text "PD2 / PC2" at 3890,170 h75 r90
  text "PD3 / PC3" at 3990,170 h75 r90
  text "PD4 / PC4" at 4090,170 h75 r90
  text "PD5 / PC5" at 4190,170 h75 r90
  text "PD6 / PC6" at 4290,170 h75 r90
  text "PD7 / PC7" at 4390,170 h75 r90
  text "3.3v / 3.3v" at -355,160 h75 r90
  text "GND / GND" at -255,160 h75 r90
  text "5.0v / 5.0v" at -155,160 h75 r90
  text "GND / GND" at -55,160 h75 r90
  text "PB0 / PA0" at 145,160 h75 r90
  text "PB1 / PA1" at 245,160 h75 r90
  text "PB1 / PA1" at 345,160 h75 r90
  text "PB3 / PA3" at 445,160 h75 r90
  text "PB4 / PA4" at 545,160 h75 r90
  text "PB5 / PA5" at 645,160 h75 r90
  text "PB6 / PA6" at 745,160 h75 r90
  text "PB7 / PA7" at 845,160 h75 r90
  text "PD0 / PC0" at 950,160 h75 r90
  text "PD1 / PC1" at 1050,160 h75 r90
  text "PD2 / PC2" at 1150,160 h75 r90
  text "PD3 / PC3" at 1250,160 h75 r90
  text "PD4 / PC4" at 1350,160 h75 r90
  text "PD5 / PC5" at 1450,160 h75 r90
  text "PD6 / PC6" at 1550,160 h75 r90
  text "PD7 / PC7" at 1650,160 h75 r90
Mechanical 15:
  circle w5: c-156.3,18.7 r78.74
  circle w5: c-156.3,2774.61 r78.74
  circle w5: c4174.41,2774.61 r78.74
  circle w5: c4174.41,18.7 r78.74
  lines w5: 4048.11,-161.3 4048.11,2594.61
  lines w10: -520,-180 4530,-180 4530,2945 -520,2945 -520,-180